# Altium PCB MDBT50Q-1M_Footprint Model.PcbDoc
Units mil, origin at the board's own origin, x right, y up, seen from the top; angles counter-clockwise.
Board outline 1000 x 1750 mil, 2 copper layers (Top Layer, Bottom Layer); 1 components, 0 nets, 64 pads, 0 vias.
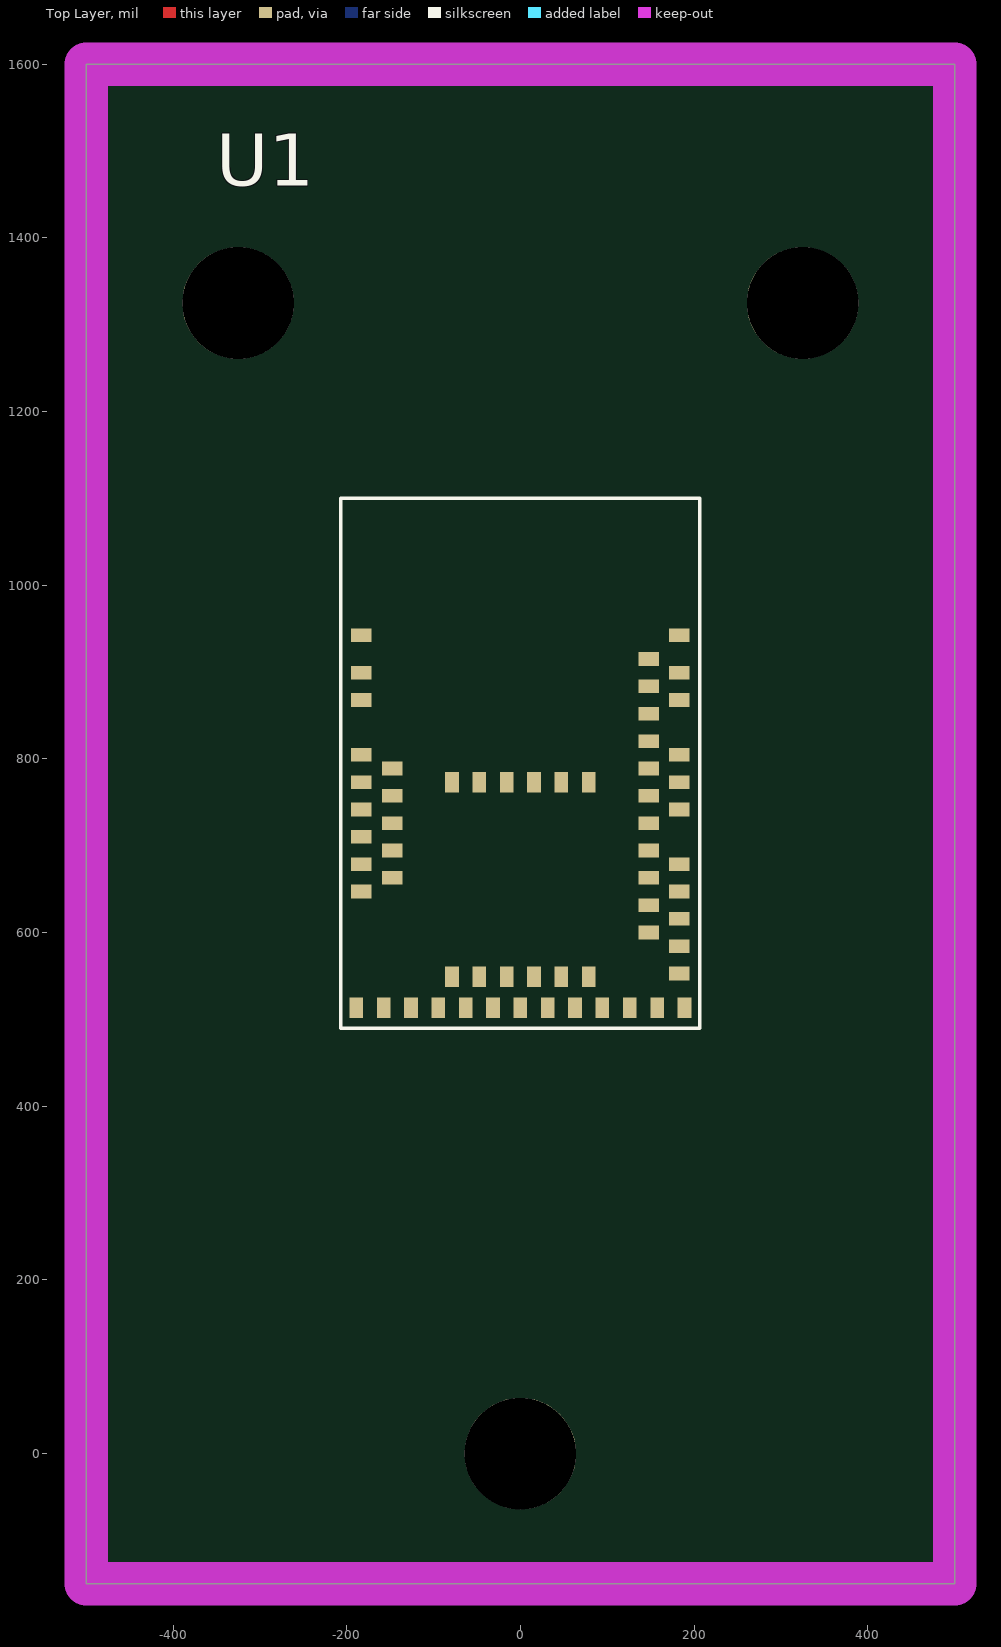
[diagram p0: Top Layer view]
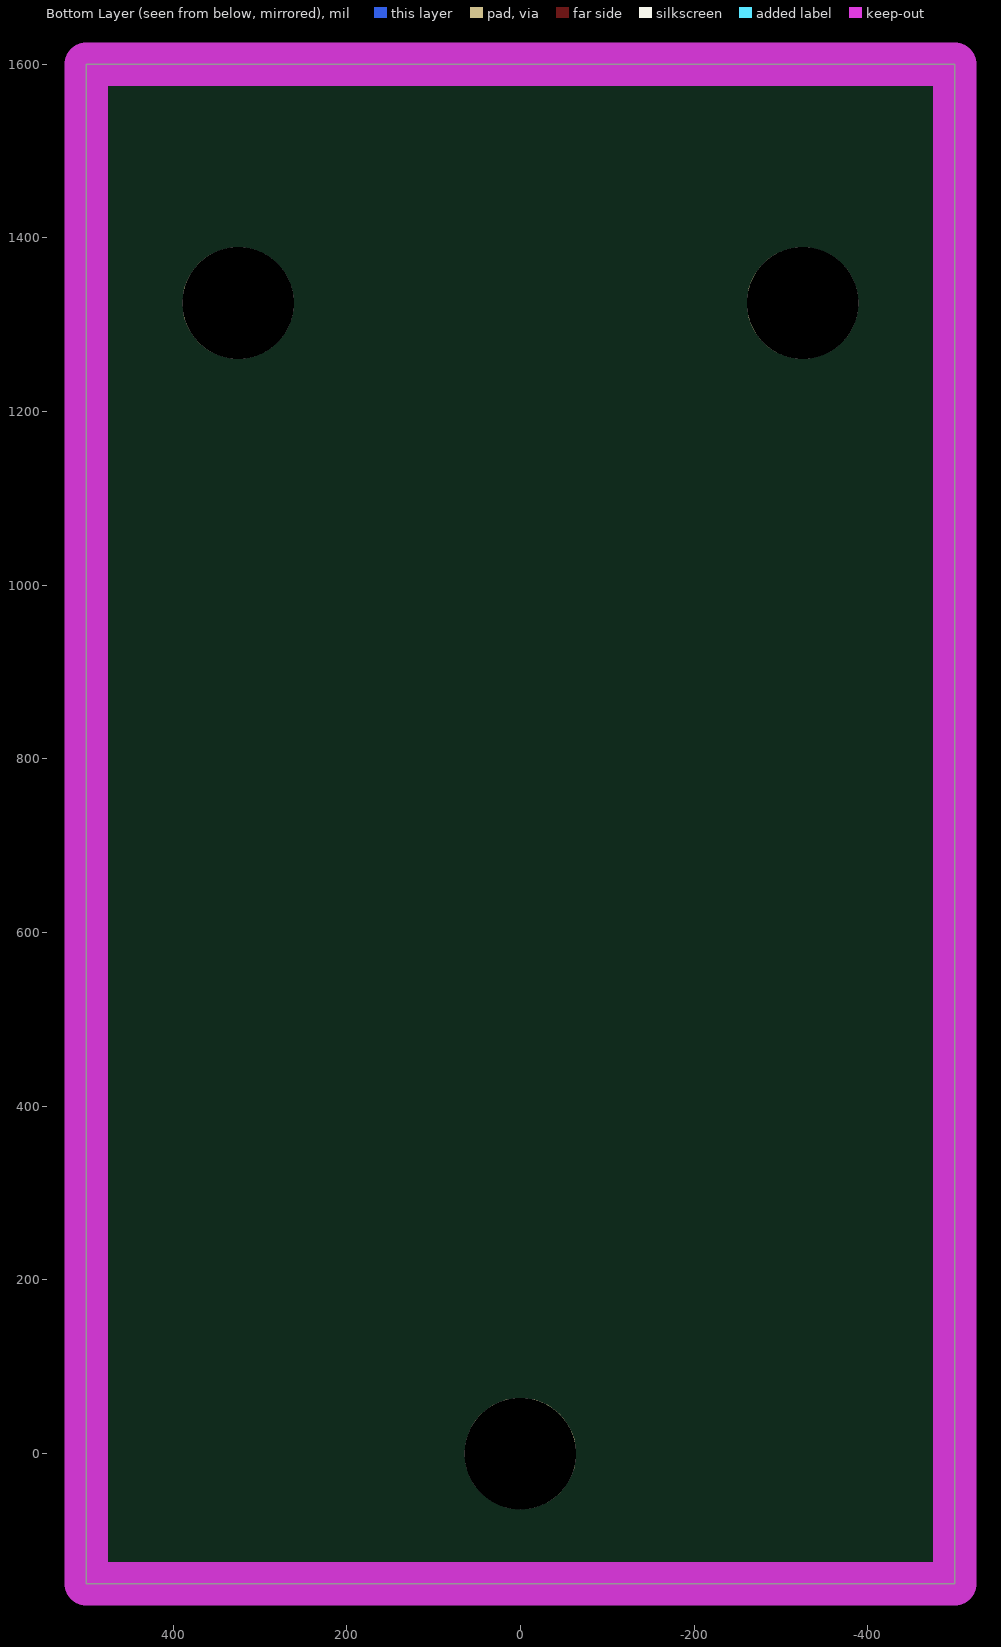
[diagram p1: Bottom Layer view, seen from below]

## Layer stack, top to bottom
Top Solder: solder mask 0.4, Solder Resist, Dk 3.5
Top Layer: signal copper 1.4
Dielectric 1: dielectric 12.6, FR-4, Dk 4.8
Bottom Layer: signal copper 1.4
Bottom Solder: solder mask 0.4, Solder Resist, Dk 3.5

## Board outline
-500,-150 -500,1600 500,1600 500,-150

## Design rules (kind name [scope] priority, off if disabled: settings)
Clearance [All] p1: gap=10 ignorepadtopadclearanceinfootprint=FALSE except(0: Arc-Hole Track-Hole SMDPad-Hole THPad-Hole Via-Hole Fill-Hole Poly-Hole Region-Hole Text-Hole)
PolygonConnect [All] p1: connectstyle=Relief reliefconductorwidth=10 reliefentries=4 polygonreliefangle="90 Angle" airgapwidth=10
RoutingVias [All] p1: holewidth=28 width=50 viastyle="Through Hole" minholewidth=28 minwidth=50 maxholewidth=28 maxwidth=50
SolderMaskExpansion [All] p1: expansion=4 istentingtop=FALSE
Width [All] p1: maxlimit=10 minlimit=10 preferedwidth=10
30 further rules are at their usual default settings.

## Components (designator, comment, footprint, x,y, rotation, side; value= is the part's Value field where it differs from the comment)
U1 "IC_MDBT50Q-1M_SMD" IC_MDBT50Q-1M_SMD 0,1100 r0 top (schematic designator U9)

## Footprints (in the part's own frame and the unit in brackets; to place one, negate y for a bottom-side part, rotate by r counter-clockwise, add the part's x,y. Pads: shape width x height; smd on the part's side, far side on the other; paste and mask are expansions set on the pad)
IC_MDBT50Q-1M_SMD [mm] "RAYTAC nRF52840 Chip Antenna"
  round 3.264 hole 3.264 unplated: 0(-8.255,5.715) 0(0,-27.94) 0(8.255,5.715)
  rect 0.6x0.4 smd mask+0.05: 1(-4.65,-4) 2(-4.65,-5.1) 3(-4.65,-5.9) 4(-4.65,-7.5) 5(-3.75,-7.9) 6(-4.65,-8.3) 7(-3.75,-8.7) 8(-4.65,-9.1) 9(-3.75,-9.5) 10(-4.65,-9.9) 11(-3.75,-10.3) 12(-4.65,-10.7) 13(-3.75,-11.1) 14(-4.65,-11.5) 34(4.65,-13.9) 35(4.65,-13.1) 36(3.75,-12.7) 37(4.65,-12.3) 38(3.75,-11.9) 39(4.65,-11.5) 40(3.75,-11.1) 41(4.65,-10.7) 42(3.75,-10.3) 43(3.75,-9.5) 44(4.65,-9.1) 45(3.75,-8.7) 46(4.65,-8.3) 47(3.75,-7.9) 48(4.65,-7.5) 49(3.75,-7.1) 50(3.75,-6.3) 51(4.65,-5.9) 52(3.75,-5.5) 53(4.65,-5.1) 54(3.75,-4.7) 55(4.65,-4)
  rect 0.4x0.6 smd mask+0.05: 15(-4.8,-14.9) 16(-4,-14.9) 17(-3.2,-14.9) 18(-2.4,-14.9) 19(-2,-14) 20(-1.6,-14.9) 21(-1.2,-14) 22(-0.8,-14.9) 23(-0.4,-14) 24(0,-14.9) 25(0.4,-14) 26(0.8,-14.9) 27(1.2,-14) 28(1.6,-14.9) 29(2,-14) 30(2.4,-14.9) 31(3.2,-14.9) 32(4,-14.9) 33(4.8,-14.9) 56(-2,-8.3) 57(-1.2,-8.3) 58(-0.4,-8.3) 59(0.4,-8.3) 60(1.2,-8.3) 61(2,-8.3)
  silkscreen extent -5.25,-15.5 5.25,0, body extent -5.25,-15.5 5.25,0, height 2.2

## Part data
U1: "MDBT50Q-1M NRF52840 BASED BLE MO", Case/Package=SMD/SMT, Current - Receiving=32.7mA, Current - Transmitting=11.1mA, Frequency=2.5GHz, Manufacturer="Seeed Studio", Manufacturer Part Number=113990582, Max Operating Temperature=85°C, Min Operating Temperature=-40°C, Supplier Part Number 1=1597-1678-ND, Category="RF Receivers, Transceivers", ComponentLink1Description=http://www.raytac.com/download/index.php?index_id=24&src-supplier=Digi-Key, ComponentLink1URL=http://www.raytac.com/download/index.php?index_id=24&src-supplier=Digi-Key, Data Rate=2Mbps, Interface=I2C,SPI,USB,ADC,GPIO,UART, Memory Size=256KB, Mount="Surface Mount", Pricing 1="1=10.10000 (USD)", RoHS=No, Sensitivity=-103dBm, Supplier 1=Digi-Key

## Nets (pads, with @x,y where several pads share a name; then routed paths per layer and width w, separated by ;. In a path a pad name is that pad's centre, name@x,y a point inside that pad or via, vN(x,y) a via of type N, cw(c..) or ccw(c..) an arc to the next point about the centre after c; other vN are vias at no path point)
pads on no net: U1.0 U1.1 U1.2 U1.3 U1.4 U1.5 U1.6 U1.7 U1.8 U1.9 U1.10 U1.11 U1.12 U1.13 U1.14 U1.15 U1.16 U1.17 U1.18 U1.19 U1.20 U1.21 U1.22 U1.23 U1.24 U1.25 U1.26 U1.27 U1.28 U1.29 U1.30 U1.31 U1.32 U1.33 U1.34 U1.35 U1.36 U1.37 U1.38 U1.39 U1.40 U1.41 U1.42 U1.43 U1.44 U1.45 U1.46 U1.47 U1.48 U1.49 U1.50 U1.51 U1.52 U1.53 U1.54 U1.55 U1.56 U1.57 U1.58 U1.59 U1.60 U1.61

## Keep-outs
Keep-Out Layer:
  the board outline again, w50

## Text inside footprints (layer, text, board x,y; h text height)
U1: Mechanical 2 "No ground pad" at -110.29,1030.12 h17.72; Mechanical 3 "Toplayer no ground pad" at -133.86,854.92 h11.81